# Altium PCB cs301_07b.PcbDoc (part 1 of 2)
Units mil, origin at the board's own origin, x right, y up, seen from the top; angles counter-clockwise.
Board outline 3480 x 5007.33 mil, 2 copper layers (Top Layer, Bottom Layer); 134 components, 90 nets, 408 pads, 151 vias.
Unrouted connection lines stored in the file: 2.
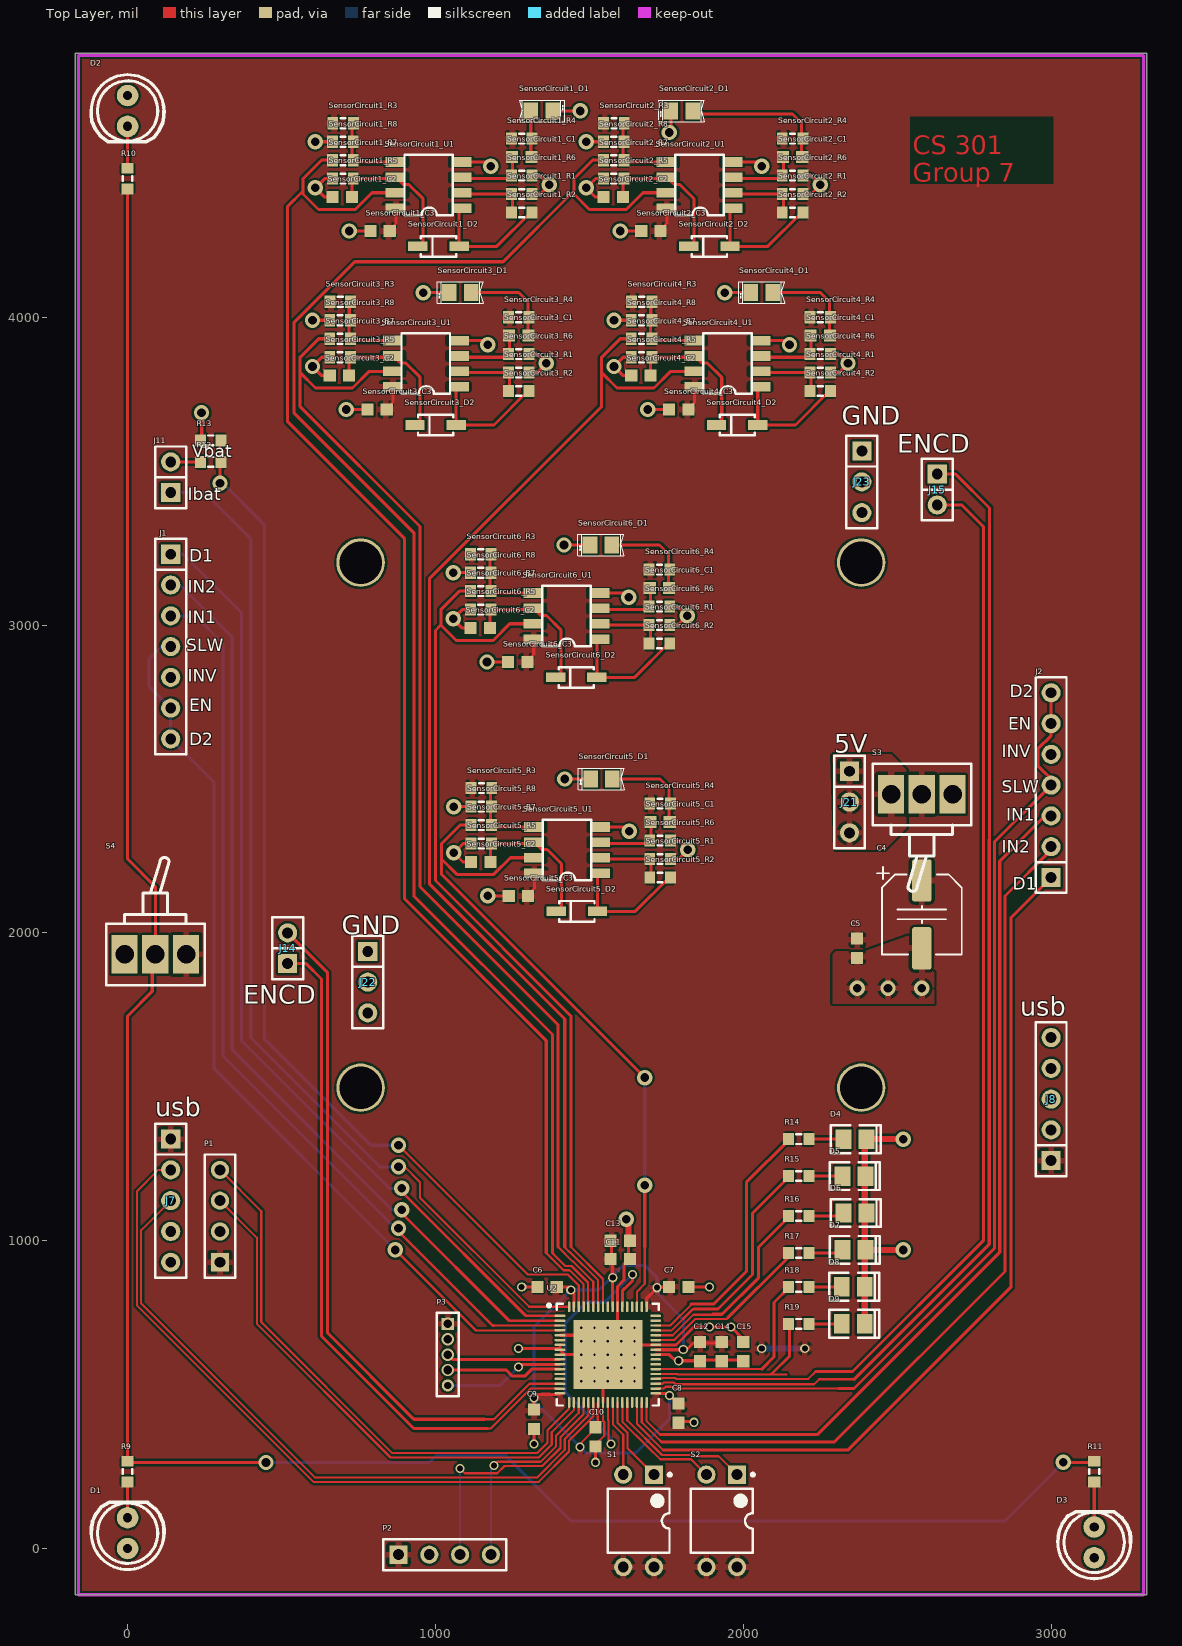
[diagram p0: Top Layer view]
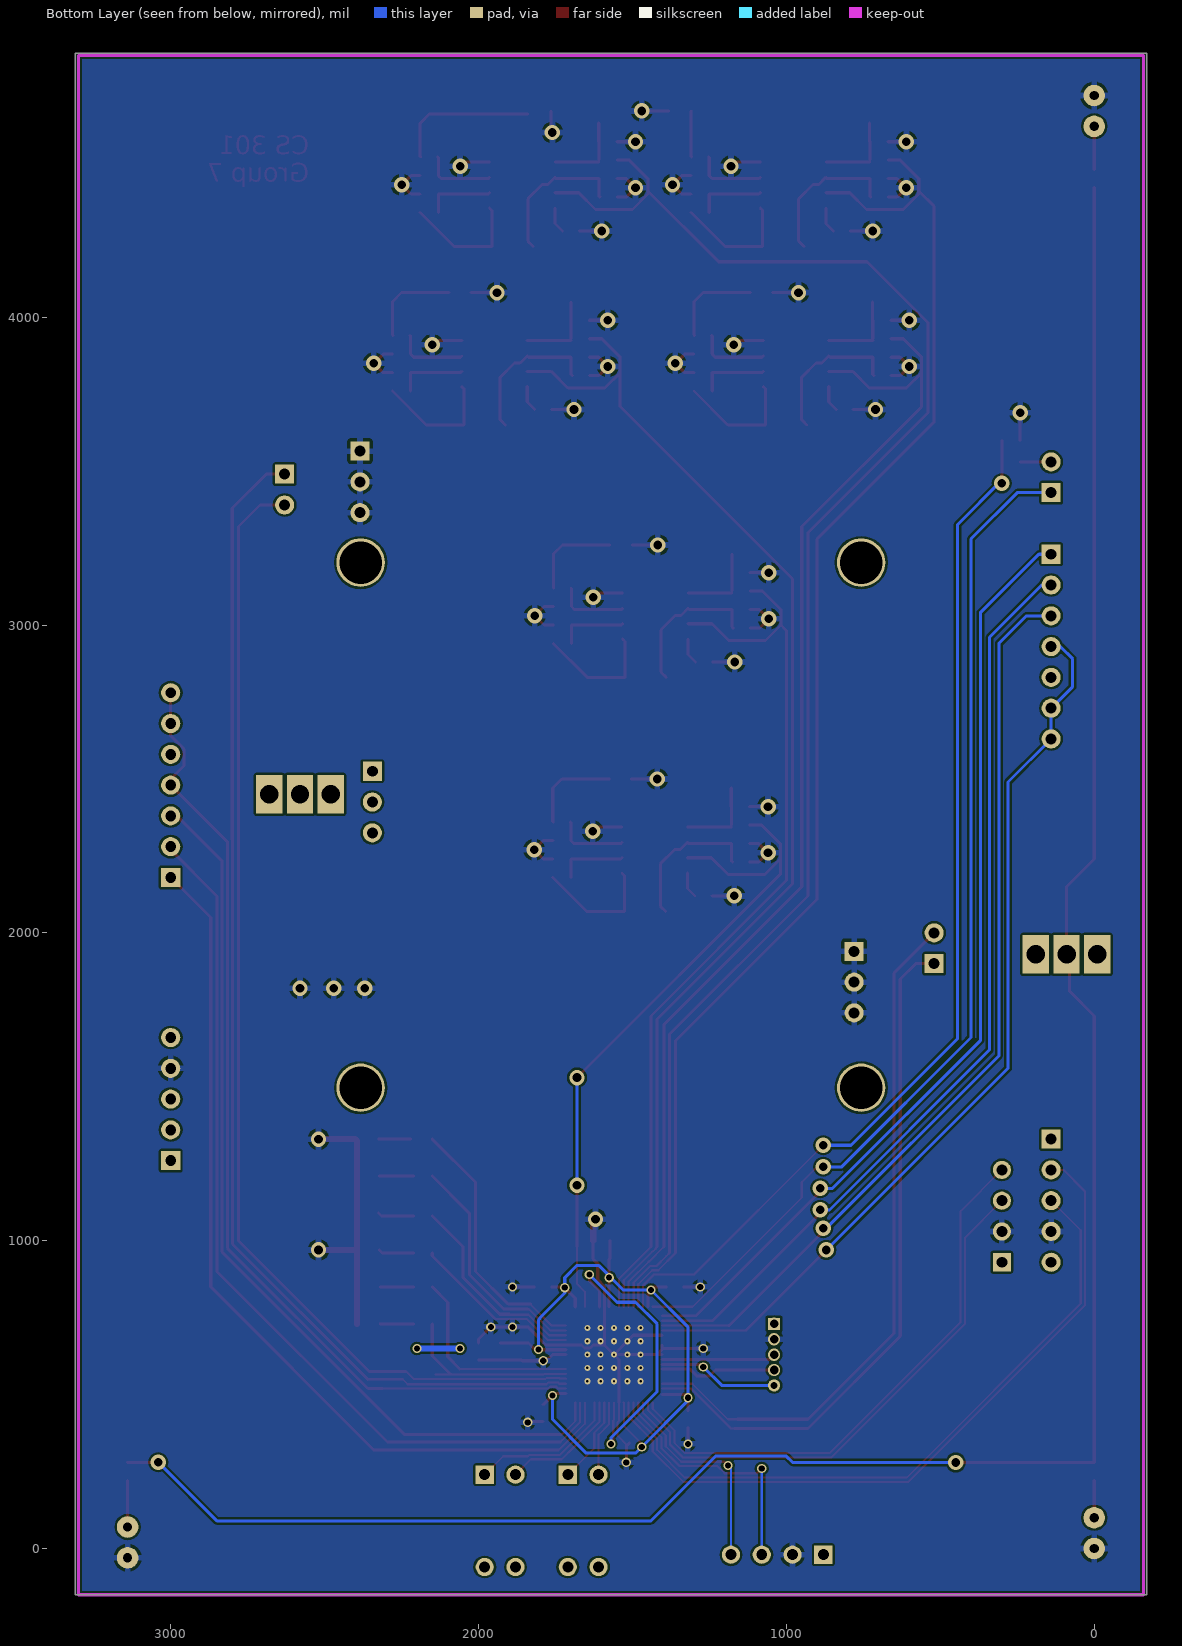
[diagram p1: Bottom Layer view, seen from below]

## Layer stack, top to bottom
Top Solder: solder mask 0.4, Solder Resist, Dk 3.5
Top Layer: signal copper 1.4
Dielectric1: dielectric 12.6, FR-4, Dk 4.8
Bottom Layer: signal copper 1.4
Bottom Solder: solder mask 0.4, Solder Resist, Dk 3.5

## Board outline
-170,4857.33 -170,4750 -170,-150 3310,-150 3310,4857.33

## Design rules (kind name [scope] priority, off if disabled: settings)
Clearance [All] p1: gap=7 ignorepadtopadclearanceinfootprint=FALSE
PolygonConnect [All] p1: connectstyle=Relief reliefconductorwidth=20 reliefentries=4 polygonreliefangle="90 Angle" airgapwidth=10
RoomDefinition SensorCircuit6 [InComponentClass('SensorCircuit6')] p1: confinementstyle=ConfineIn formatcopy=TRUE lockcomponents=FALSE outline 977.56,2790 1857.56,2790 1857.56,3350 977.56,3350
RoomDefinition SensorCircuit5 [InComponentClass('SensorCircuit5')] p2: confinementstyle=ConfineIn formatcopy=TRUE lockcomponents=FALSE outline 979.53,2030 1859.53,2030 1859.53,2590 979.53,2590
RoomDefinition SensorCircuit3 [InComponentClass('SensorCircuit3')] p3: confinementstyle=ConfineIn formatcopy=TRUE lockcomponents=FALSE outline 520.47,3610 1400.47,3610 1400.47,4170 520.47,4170
RoomDefinition SensorCircuit2 [InComponentClass('SensorCircuit2')] p4: confinementstyle=ConfineIn formatcopy=TRUE lockcomponents=FALSE outline 1410,4190 2290,4190 2290,4750 1410,4750
RoomDefinition SensorCircuit1 [InComponentClass('SensorCircuit1')] p5: confinementstyle=ConfineIn formatcopy=TRUE lockcomponents=FALSE outline 530,4190 1410,4190 1410,4750 530,4750
RoomDefinition SensorCircuit4 [InComponentClass('SensorCircuit4')] p6: confinementstyle=ConfineIn formatcopy=TRUE lockcomponents=FALSE outline 1500,3610 2380,3610 2380,4170 1500,4170
RoutingVias [All] p1: holewidth=20 width=30 viastyle="Through Hole" minholewidth=20 minwidth=20 maxholewidth=28 maxwidth=50
SilkToSolderMaskClearance SilkscreenOverComponentPads [IsPad] p1: minsilkscreentomaskgap=10 clearancetoexposedcopper=TRUE
SolderMaskExpansion [All] p1: expansion=4
Width [All] p1: maxlimit=30 minlimit=7 preferedwidth=10 minimp=50.000000 maximp=50.000000 favimp=50.000000
29 further rules are at their usual default settings.

## Classes and differential pairs
channel class Sheet1: SensorCircuit1 SensorCircuit2 SensorCircuit3 SensorCircuit4 SensorCircuit5 SensorCircuit6
net class SO[1..6]: SO1 SO2 SO3 SO4 SO5 SO6
component class SensorCircuit6: SensorCircuit6_C1 SensorCircuit6_C2 SensorCircuit6_C3 SensorCircuit6_D1 SensorCircuit6_D2 SensorCircuit6_R1 SensorCircuit6_R2 SensorCircuit6_R3 SensorCircuit6_R4 SensorCircuit6_R5 SensorCircuit6_R6 SensorCircuit6_R7 SensorCircuit6_R8 SensorCircuit6_U1
component class SensorCircuit5: SensorCircuit5_C1 SensorCircuit5_C2 SensorCircuit5_C3 SensorCircuit5_D1 SensorCircuit5_D2 SensorCircuit5_R1 SensorCircuit5_R2 SensorCircuit5_R3 SensorCircuit5_R4 SensorCircuit5_R5 SensorCircuit5_R6 SensorCircuit5_R7 SensorCircuit5_R8 SensorCircuit5_U1
component class SensorCircuit4: SensorCircuit4_C1 SensorCircuit4_C2 SensorCircuit4_C3 SensorCircuit4_D1 SensorCircuit4_D2 SensorCircuit4_R1 SensorCircuit4_R2 SensorCircuit4_R3 SensorCircuit4_R4 SensorCircuit4_R5 SensorCircuit4_R6 SensorCircuit4_R7 SensorCircuit4_R8 SensorCircuit4_U1
component class SensorCircuit3: SensorCircuit3_C1 SensorCircuit3_C2 SensorCircuit3_C3 SensorCircuit3_D1 SensorCircuit3_D2 SensorCircuit3_R1 SensorCircuit3_R2 SensorCircuit3_R3 SensorCircuit3_R4 SensorCircuit3_R5 SensorCircuit3_R6 SensorCircuit3_R7 SensorCircuit3_R8 SensorCircuit3_U1
component class SensorCircuit2: SensorCircuit2_C1 SensorCircuit2_C2 SensorCircuit2_C3 SensorCircuit2_D1 SensorCircuit2_D2 SensorCircuit2_R1 SensorCircuit2_R2 SensorCircuit2_R3 SensorCircuit2_R4 SensorCircuit2_R5 SensorCircuit2_R6 SensorCircuit2_R7 SensorCircuit2_R8 SensorCircuit2_U1
component class SensorCircuit1: SensorCircuit1_C1 SensorCircuit1_C2 SensorCircuit1_C3 SensorCircuit1_D1 SensorCircuit1_D2 SensorCircuit1_R1 SensorCircuit1_R2 SensorCircuit1_R3 SensorCircuit1_R4 SensorCircuit1_R5 SensorCircuit1_R6 SensorCircuit1_R7 SensorCircuit1_R8 SensorCircuit1_U1

## Components (designator, comment, footprint, x,y, rotation, side; value= is the part's Value field where it differs from the comment)
C4 "22u" ECE-CAPAE6.3X5.4SM 2580,2060 r270 top
C5 "100n" ECE-CAPC1608-0603SM 2370,1950 r90 top
C6 "100n" ECE-CAPC1608-0603SM 1362.44,850 r0 top
C7 "100n" ECE-CAPC1608-0603SM 1790,850 r180 top
C8 "100n" ECE-CAPC1608-0603SM 1790,440 r90 top
C9 "100n" ECE-CAPC1608-0603SM 1320,420 r90 top
C10 "100n" ECE-CAPC1608-0603SM 1520,362.44 r90 top
C11 "100n" ECE-CAPC1608-0603SM 1600,940 r180 top
C12 "100n" ECE-CAPC1608-0603SM 1860,640 r90 top
C13 "1u" ECE-CAPC1608-0603SM 1600,1000 r180 top
C14 "1u" ECE-CAPC1608-0603SM 1930,640 r90 top
C15 "1u" ECE-CAPC1608-0603SM 2000,640 r270 top
D1 "LED" LED0.1/5MM 0,100 r0 top
D2 "LED" LED0.1/5MM 0,4620 r180 top
D3 "LED" LED0.1/5MM 3140,70 r0 top
D4 "LED" ECE-LED2012-0805SM 2362.6,1330 r0 top
D5 "LED" ECE-LED2012-0805SM 2360,1210 r0 top
D6 "LED" ECE-LED2012-0805SM 2362.6,1090 r0 top
D7 "LED" ECE-LED2012-0805SM 2360,970 r0 top
D8 "LED" ECE-LED2012-0805SM 2357.4,850 r0 top
D9 "LED" ECE-LED2012-0805SM 2357.4,730 r0 top
J1 "CON7" SIP7 140,3230 r270 top locked
J2 "CON7" SIP7 3000,2180 r90 top locked
J7 "usb" SIP5 140,1330 r270 top locked
J8 "usb" SIP5 3000,1260 r90 top locked
J11 "Battery" sip2 140,3430 r90 top locked
J14 "ENCD" sip2 520,1900 r90 top locked
J15 "ENCD" sip2 2630,3490 r270 top locked
J21 "5V" sip3 2345,2525 r270 top locked
J22 "GND" sip3 780,1940 r270 top locked
J23 "GND" sip3 2385,3565 r270 top locked
P1 "SerialHeader" HDR1X4 300,930 r90 top
P2 "SerialHeader" HDR1X4 880,-20 r0 top
P3 "MHDR1X5" MHDR1X5 1040,730 r270 top
R9 "150" ECE-RESC1608-0603SM 0,250 r270 top
R10 "150" ECE-RESC1608-0603SM 0,4450.47 r90 top
R11 "150" ECE-RESC1608-0603SM 3140,250 r270 top
R12 "100K" ECE-RESC1608-0603SM 270,3530 r0 top
R13 "100K" ECE-RESC1608-0603SM 270.47,3600 r180 top
R14 "150" ECE-RESC1608-0603SM 2180,1330 r0 top
R15 "150" ECE-RESC1608-0603SM 2180,1210 r0 top
R16 "150" ECE-RESC1608-0603SM 2180,1080 r0 top
R17 "150" ECE-RESC1608-0603SM 2180,960 r0 top
R18 "150" ECE-RESC1608-0603SM 2180,850 r0 top
R19 "150" ECE-RESC1608-0603SM 2180,730 r0 top
S1 "SW DIP-2" DIP-4 1660,90 r270 top
S2 "SW DIP-2" DIP-4 1930,90 r270 top
S3 "SW-SPDT" SW-SPDT 2680,2450 r180 top
S4 "SW-SPDT" SW-SPDT -10,1930 r0 top
SensorCircuit1_C1 "15n" ECE-CAPC1608-0603SM 1280,4520 r0 top (schematic designator C1)
SensorCircuit1_C2 "680n" ECE-CAPC1608-0603SM 697.56,4390 r0 top (schematic designator C2)
SensorCircuit1_C3 "100n" ECE-CAPC1608-0603SM 820,4280 r180 top (schematic designator C3)
SensorCircuit1_D1 "TEMT6200" ECE-SENSOR-0805SM 1345.43,4670 r180 top (schematic designator D1)
SensorCircuit1_D2 "1N4148" ECE-DIO-SOD123SM 1010,4230 r180 top (schematic designator D2)
SensorCircuit1_R1 "5.6k" ECE-RESC1608-0603SM 1280,4400 r0 top (schematic designator R1)
SensorCircuit1_R2 "100k" ECE-RESC1608-0603SM 1280,4340 r0 top (schematic designator R2)
SensorCircuit1_R3 "47k" ECE-RESC1608-0603SM 700,4630 r180 top (schematic designator R3)
SensorCircuit1_R4 "100k" ECE-RESC1608-0603SM 1280,4580 r180 top (schematic designator R4)
SensorCircuit1_R5 "100k" ECE-RESC1608-0603SM 699.53,4450 r0 top (schematic designator R5)
SensorCircuit1_R6 "100k" ECE-RESC1608-0603SM 1280,4460 r180 top (schematic designator R6)
SensorCircuit1_R7 "100k" ECE-RESC1608-0603SM 699.53,4510 r0 top (schematic designator R7)
SensorCircuit1_R8 "47k" ECE-RESC1608-0603SM 699.53,4570 r0 top (schematic designator R8)
SensorCircuit1_U1 "LT6221" ECE-SO8 978.11,4429.13 r180 top (schematic designator U1)
SensorCircuit2_C1 "15n" ECE-CAPC1608-0603SM 2160,4520 r0 top (schematic designator C1)
SensorCircuit2_C2 "680n" ECE-CAPC1608-0603SM 1577.56,4390 r0 top (schematic designator C2)
SensorCircuit2_C3 "100n" ECE-CAPC1608-0603SM 1700,4280 r180 top (schematic designator C3)
SensorCircuit2_D1 "TEMT6200" ECE-SENSOR-0805SM 1800,4670 r0 top (schematic designator D1)
SensorCircuit2_D2 "1N4148" ECE-DIO-SOD123SM 1890,4230 r180 top (schematic designator D2)
SensorCircuit2_R1 "5.6k" ECE-RESC1608-0603SM 2160,4400 r0 top (schematic designator R1)
SensorCircuit2_R2 "100k" ECE-RESC1608-0603SM 2160,4340 r0 top (schematic designator R2)
SensorCircuit2_R3 "47k" ECE-RESC1608-0603SM 1580,4630 r180 top (schematic designator R3)
SensorCircuit2_R4 "100k" ECE-RESC1608-0603SM 2160,4580 r180 top (schematic designator R4)
SensorCircuit2_R5 "100k" ECE-RESC1608-0603SM 1579.53,4450 r0 top (schematic designator R5)
SensorCircuit2_R6 "100k" ECE-RESC1608-0603SM 2160,4460 r180 top (schematic designator R6)
SensorCircuit2_R7 "100k" ECE-RESC1608-0603SM 1579.53,4510 r0 top (schematic designator R7)
SensorCircuit2_R8 "47k" ECE-RESC1608-0603SM 1579.53,4570 r0 top (schematic designator R8)
SensorCircuit2_U1 "LT6221" ECE-SO8 1858.11,4429.13 r180 top (schematic designator U1)
SensorCircuit3_C1 "15n" ECE-CAPC1608-0603SM 1270.47,3940 r0 top (schematic designator C1)
SensorCircuit3_C2 "680n" ECE-CAPC1608-0603SM 688.03,3810 r0 top (schematic designator C2)
SensorCircuit3_C3 "100n" ECE-CAPC1608-0603SM 810.47,3700 r180 top (schematic designator C3)
SensorCircuit3_D1 "TEMT6200" ECE-SENSOR-0805SM 1080.47,4080 r0 top (schematic designator D1)
SensorCircuit3_D2 "1N4148" ECE-DIO-SOD123SM 1000.47,3650 r180 top (schematic designator D2)
SensorCircuit3_R1 "5.6k" ECE-RESC1608-0603SM 1270.47,3820 r0 top (schematic designator R1)
SensorCircuit3_R2 "100k" ECE-RESC1608-0603SM 1270.47,3760 r0 top (schematic designator R2)
SensorCircuit3_R3 "47k" ECE-RESC1608-0603SM 690.47,4050 r180 top (schematic designator R3)
SensorCircuit3_R4 "100k" ECE-RESC1608-0603SM 1270.47,4000 r180 top (schematic designator R4)
SensorCircuit3_R5 "100k" ECE-RESC1608-0603SM 690,3870 r0 top (schematic designator R5)
SensorCircuit3_R6 "100k" ECE-RESC1608-0603SM 1270.47,3880 r180 top (schematic designator R6)
SensorCircuit3_R7 "100k" ECE-RESC1608-0603SM 690,3930 r0 top (schematic designator R7)
SensorCircuit3_R8 "47k" ECE-RESC1608-0603SM 690,3990 r0 top (schematic designator R8)
SensorCircuit3_U1 "LT6221" ECE-SO8 968.58,3849.13 r180 top (schematic designator U1)
SensorCircuit4_C1 "15n" ECE-CAPC1608-0603SM 2250,3940 r0 top (schematic designator C1)
SensorCircuit4_C2 "680n" ECE-CAPC1608-0603SM 1667.56,3810 r0 top (schematic designator C2)
SensorCircuit4_C3 "100n" ECE-CAPC1608-0603SM 1790,3700 r180 top (schematic designator C3)
SensorCircuit4_D1 "TEMT6200" ECE-SENSOR-0805SM 2060,4080 r0 top (schematic designator D1)
SensorCircuit4_D2 "1N4148" ECE-DIO-SOD123SM 1980,3650 r180 top (schematic designator D2)
SensorCircuit4_R1 "5.6k" ECE-RESC1608-0603SM 2250,3820 r0 top (schematic designator R1)
SensorCircuit4_R2 "100k" ECE-RESC1608-0603SM 2250,3760 r0 top (schematic designator R2)
SensorCircuit4_R3 "47k" ECE-RESC1608-0603SM 1670,4050 r180 top (schematic designator R3)
SensorCircuit4_R4 "100k" ECE-RESC1608-0603SM 2250,4000 r180 top (schematic designator R4)
SensorCircuit4_R5 "100k" ECE-RESC1608-0603SM 1669.53,3870 r0 top (schematic designator R5)
SensorCircuit4_R6 "100k" ECE-RESC1608-0603SM 2250,3880 r180 top (schematic designator R6)
SensorCircuit4_R7 "100k" ECE-RESC1608-0603SM 1669.53,3930 r0 top (schematic designator R7)
SensorCircuit4_R8 "47k" ECE-RESC1608-0603SM 1669.53,3990 r0 top (schematic designator R8)
SensorCircuit4_U1 "LT6221" ECE-SO8 1948.11,3849.13 r180 top (schematic designator U1)
SensorCircuit5_C1 "15n" ECE-CAPC1608-0603SM 1729.53,2360 r0 top (schematic designator C1)
SensorCircuit5_C2 "680n" ECE-CAPC1608-0603SM 1147.09,2230 r0 top (schematic designator C2)
SensorCircuit5_C3 "100n" ECE-CAPC1608-0603SM 1269.53,2120 r180 top (schematic designator C3)
SensorCircuit5_D1 "TEMT6200" ECE-SENSOR-0805SM 1539.53,2500 r0 top (schematic designator D1)
SensorCircuit5_D2 "1N4148" ECE-DIO-SOD123SM 1459.53,2070 r180 top (schematic designator D2)
SensorCircuit5_R1 "5.6k" ECE-RESC1608-0603SM 1729.53,2240 r0 top (schematic designator R1)
SensorCircuit5_R2 "100k" ECE-RESC1608-0603SM 1729.53,2180 r0 top (schematic designator R2)
SensorCircuit5_R3 "47k" ECE-RESC1608-0603SM 1149.53,2470 r180 top (schematic designator R3)
SensorCircuit5_R4 "100k" ECE-RESC1608-0603SM 1729.53,2420 r180 top (schematic designator R4)
SensorCircuit5_R5 "100k" ECE-RESC1608-0603SM 1149.06,2290 r0 top (schematic designator R5)
SensorCircuit5_R6 "100k" ECE-RESC1608-0603SM 1729.53,2300 r180 top (schematic designator R6)
SensorCircuit5_R7 "100k" ECE-RESC1608-0603SM 1149.06,2350 r0 top (schematic designator R7)
SensorCircuit5_R8 "47k" ECE-RESC1608-0603SM 1149.06,2410 r0 top (schematic designator R8)
SensorCircuit5_U1 "LT6221" ECE-SO8 1427.64,2269.13 r180 top (schematic designator U1)
SensorCircuit6_C1 "15n" ECE-CAPC1608-0603SM 1727.56,3120 r0 top (schematic designator C1)
SensorCircuit6_C2 "680n" ECE-CAPC1608-0603SM 1145.12,2990 r0 top (schematic designator C2)
SensorCircuit6_C3 "100n" ECE-CAPC1608-0603SM 1267.56,2880 r180 top (schematic designator C3)
SensorCircuit6_D1 "TEMT6200" ECE-SENSOR-0805SM 1537.56,3260 r0 top (schematic designator D1)
SensorCircuit6_D2 "1N4148" ECE-DIO-SOD123SM 1457.56,2830 r180 top (schematic designator D2)
SensorCircuit6_R1 "5.6k" ECE-RESC1608-0603SM 1727.56,3000 r0 top (schematic designator R1)
SensorCircuit6_R2 "100k" ECE-RESC1608-0603SM 1727.56,2940 r0 top (schematic designator R2)
SensorCircuit6_R3 "47k" ECE-RESC1608-0603SM 1147.56,3230 r180 top (schematic designator R3)
SensorCircuit6_R4 "100k" ECE-RESC1608-0603SM 1727.56,3180 r180 top (schematic designator R4)
SensorCircuit6_R5 "100k" ECE-RESC1608-0603SM 1147.09,3050 r0 top (schematic designator R5)
SensorCircuit6_R6 "100k" ECE-RESC1608-0603SM 1727.56,3060 r180 top (schematic designator R6)
SensorCircuit6_R7 "100k" ECE-RESC1608-0603SM 1147.09,3110 r0 top (schematic designator R7)
SensorCircuit6_R8 "47k" ECE-RESC1608-0603SM 1147.09,3170 r0 top (schematic designator R8)
SensorCircuit6_U1 "LT6221" ECE-SO8 1425.67,3029.13 r180 top (schematic designator U1)
U2 "CY8C5888LTI-LP097" CYP-LTX68_N 1560,630 r0 top

## Footprints (in the part's own frame and the unit in brackets; to place one, negate y for a bottom-side part, rotate by r counter-clockwise, add the part's x,y. Pads: shape width x height; smd on the part's side, far side on the other; paste and mask are expansions set on the pad)
CYP-LTX68_N [mm] "QFN, 68-Leads, Body 8x8mm, Pitch 0.4mm, Thermal Pad 5.7x5.7mm, IPC Medium Density"
  oval 0.9x0.2 smd: 1(-3.95,3.2) 2(-3.95,2.8) 3(-3.95,2.4) 4(-3.95,2) 5(-3.95,1.6) 6(-3.95,1.2) 7(-3.95,0.8) 8(-3.95,0.4) 9(-3.95,0) 10(-3.95,-0.4) 11(-3.95,-0.8) 12(-3.95,-1.2) 13(-3.95,-1.6) 14(-3.95,-2) 15(-3.95,-2.4) 16(-3.95,-2.8) 17(-3.95,-3.2) 35(3.95,-3.2) 36(3.95,-2.8) 37(3.95,-2.4) 38(3.95,-2) 39(3.95,-1.6) 40(3.95,-1.2) 41(3.95,-0.8) 42(3.95,-0.4) 43(3.95,0) 44(3.95,0.4) 45(3.95,0.8) 46(3.95,1.2) 47(3.95,1.6) 48(3.95,2) 49(3.95,2.4) 50(3.95,2.8) 51(3.95,3.2)
  oval 0.2x0.9 smd: 18(-3.2,-3.95) 19(-2.8,-3.95) 20(-2.4,-3.95) 21(-2,-3.95) 22(-1.6,-3.95) 23(-1.2,-3.95) 24(-0.8,-3.95) 25(-0.4,-3.95) 26(0,-3.95) 27(0.4,-3.95) 28(0.8,-3.95) 29(1.2,-3.95) 30(1.6,-3.95) 31(2,-3.95) 32(2.4,-3.95) 33(2.8,-3.95) 34(3.2,-3.95) 52(3.2,3.95) 53(2.8,3.95) 54(2.4,3.95) 55(2,3.95) 56(1.6,3.95) 57(1.2,3.95) 58(0.8,3.95) 59(0.4,3.95) 60(0,3.95) 61(-0.4,3.95) 62(-0.8,3.95) 63(-1.2,3.95) 64(-1.6,3.95) 65(-2,3.95) 66(-2.4,3.95) 67(-2.8,3.95) 68(-3.2,3.95)
  rect 5.7x5.7 smd: 69(0,0)
  silkscreen extent -4.97,-4.2 4.2,4.2, body extent -4.05,-4.05 4.05,4.05, height 1
DIP-4 [mm] "DIP; 4 Leads; Row Spacing 7.62 mm; Pitch 2.54 mm"
  rect 1.5x1.5 hole 0.9: 1(-3.81,1.27)
  round 1.5 hole 0.9: 2(-3.81,-1.27) 3(3.81,-1.27) 4(3.81,1.27)
  silkscreen extent -3.93,-2.55 2.65,2.7, body extent -3.15,-2.5 3.15,2.5, height 5.6
ECE-CAPAE6.3X5.4SM [mm] "Capacitor, polarized, aluminum can; 6.3x5.4mm DxH"
  round 0.508 on Mech15: 0(0,0)
  rrect25% 3.5x1.6 smd: 1(-2.8,0) 2(2.8,0)
  silkscreen extent -3.9,-3.7 3.3,3.3, body extent -3.3,-3.3 3.3,3.3, height 4.23
ECE-CAPC1608-0603SM [mm] "Chip Capacitor, Body 1.6x0.8mm, IPC Medium Density"
  rect 1x1 smd: 1(-0.8,0) 2(0.8,0)
  body extent -0.87,-0.48 0.87,0.48, height 0.85
ECE-DIO-SOD123SM [mm] "SOD-123; 2 Leads; Body 2.7 x 1.6 mm, (LxW)"
  rect 1.6x0.8 smd: 1(-1.7,0) 2(1.7,0)
  silkscreen extent -1.45,-0.85 1.45,0.85
ECE-LED2012-0805SM [mm] "RED AS AlGaAs SMD LED, Body; 2mm x 1.25 mm (LxW)"
  rect 1.3x1.6 smd: 1(-0.95,0) 2(0.95,0)
  silkscreen extent -2,-1.15 2.13,1.15
ECE-RESC1608-0603SM [mm] "Chip Resistor, Body 1.6x0.8mm, IPC Medium Density"
  rect 0.9x1 smd: 1(-0.85,0) 2(0.85,0)
  silkscreen extent -0.2,-0.4 0.2,0.4, body extent -0.85,-0.48 0.85,0.48, height 0.6
ECE-SENSOR-0805SM [mm] "Chip Sensor, Body 2.0x1.3mm, IPC Medium Density"
  rect 1.2x1.4 smd: 1(-0.9,0) 2(0.9,0)
  silkscreen extent -1.91,-0.89 1.88,0.89
ECE-SO8 [mm] "8-Lead Plastic Small Outline, 1.27mm pitch"
  rect 1.5x0.8 smd: 1(-2.8,1.905) 2(-2.8,0.635) 3(-2.8,-0.635) 4(-2.8,-1.9) 5(2.8,-1.905) 6(2.8,-0.635) 7(2.8,0.635) 8(2.8,1.905)
  silkscreen extent -2,-2.5 2,2.5, body extent -3,-2.45 3,2.45, height 1.7
HDR1X4 [mm] "Connector; Header; 4 Position"
  rect 1.5x1.5 hole 0.9: 1(0,0)
  round 1.5 hole 0.9: 2(2.54,0) 3(5.08,0) 4(7.62,0)
  silkscreen extent -1.27,-1.27 8.89,1.27
LED0.1/5MM [mil]
  round 70 hole 30: A(0,0) K(0,-100)
  silkscreen extent -118,-168 118,50
MHDR1X5 [mm] "Connector; Header; 5 Position"
  rect 1x1 hole 0.6: 1(0,0)
  round 1 hole 0.6: 2(1.27,0) 3(2.54,0) 4(3.81,0) 5(5.08,0)
  silkscreen extent -0.9,-0.9 5.98,0.9
sip2 [mil]
  rect 62x62 hole 35.43: 1(0,0)
  round 62 hole 35.43: 2(100,0)
  silkscreen extent -50,-50 150,50
sip3 [mil]
  rect 62x62 hole 35.43: 1(0,0)
  round 62 hole 35.43: 2(100,0) 3(200,0)
  silkscreen extent -50,-50 250,50
SIP5 [mil]
  rect 62x62 hole 35.43: 1(0,0)
  round 62 hole 35.43: 2(100,0) 3(200,0) 4(300,0) 5(400,0)
  silkscreen extent -50,-50 450,50
SIP7 [mil]
  rect 62x62 hole 35.43: 1(0,0)
  round 62 hole 35.43: 2(100,0) 3(200,0) 4(300,0) 5(400,0) 6(500,0) 7(600,0)
  silkscreen extent -50,-50 650,50
SW-SPDT [mil]
  rect 85x125 hole 60: 1(0,0) 2(100,0) 3(200,0)
  silkscreen extent -60,-100 260,315

## Part data
C4: library part CAP000304, "CAP 22uF 35V ELE SM", Revision="July-2002: Re-released for DXP Platform.", UoA Stock#=CAP000304
C5 C6 C7 C8 C9 C10 C11 C12 SensorCircuit1_C3 SensorCircuit2_C3 SensorCircuit3_C3 SensorCircuit4_C3 SensorCircuit5_C3 SensorCircuit6_C3: library part CAP000624, "CAP CER 100nF 25V X7R SM0603", UoA Stock#=CAP000624
C13 C14 C15: library part CAP000630, "CAP CER 1uF 50V X7R SM0603", UoA Stock#=CAP000630
D4 D5 D6 D7 D8 D9: library part DIO000105, "LED RED ORANGE CLEAR 0805 SMD", UoA Stock#=DIO000105
J1 J2: "Connector"
J7 J8: library part CON5, "Connector"
J11 J14 J15: library part CON2, "Connector"
J21 J22 J23: library part CON3, "Connector"
P1 P2: library part "Header 4", "Header, 4-Pin", LatestRevisionDate=17-Jul-2002, LatestRevisionNote="Re-released for DXP Platform.", Publisher="Altium Limited"
P3: "Header, 5-Pin", LatestRevisionDate=17-Jul-2002, LatestRevisionNote="Re-released for DXP Platform.", Publisher="Altium Limited"
R9 R10 R11 R14 R15 R16 R17 R18 R19: library part RES000128, "RES CER 150R 1608 SM", UoA Stock#=RES000128
R12 R13 SensorCircuit1_R2 SensorCircuit1_R4 SensorCircuit1_R5 SensorCircuit1_R6 SensorCircuit1_R7 SensorCircuit2_R2 SensorCircuit2_R4 SensorCircuit2_R5 SensorCircuit2_R6 SensorCircuit2_R7 SensorCircuit3_R2 SensorCircuit3_R4 SensorCircuit3_R5 SensorCircuit3_R6 SensorCircuit3_R7 SensorCircuit4_R2 SensorCircuit4_R4 SensorCircuit4_R5 SensorCircuit4_R6 SensorCircuit4_R7 SensorCircuit5_R2 SensorCircuit5_R4 SensorCircuit5_R5 SensorCircuit5_R6 SensorCircuit5_R7 SensorCircuit6_R2 SensorCircuit6_R4 SensorCircuit6_R5 SensorCircuit6_R6 SensorCircuit6_R7: library part RES000162, "RES CER 100K 1608 SM", UoA Stock#=RES000162
S1 S2: "DIP Switch, 2 Position, SPST", LatestRevisionDate=17-Jul-2002, LatestRevisionNote="Re-released for DXP Platform.", PackageReference=DIP-4, Published=24-Mar-1999, Publisher="Altium Limited"
S3 S4: "Toggle Switch"
SensorCircuit1_C1 SensorCircuit2_C1 SensorCircuit3_C1 SensorCircuit4_C1 SensorCircuit5_C1 SensorCircuit6_C1: library part CAP000619, "CAP CER 15nF 50V X7R SM0603", UoA Stock#=CAP000619
SensorCircuit1_C2 SensorCircuit2_C2 SensorCircuit3_C2 SensorCircuit4_C2 SensorCircuit5_C2 SensorCircuit6_C2: library part CAP000629, "CAP CER 680nF 25V X7R SM0603", UoA Stock#=CAP000629
SensorCircuit1_D1 SensorCircuit2_D1 SensorCircuit3_D1 SensorCircuit4_D1 SensorCircuit5_D1 SensorCircuit6_D1: library part OTH000001, "LIGHT SENSOR TEMT6200 SM", Revision="July-2002: Re-released for DXP Platform.", UoA Stock#=OTH000001
SensorCircuit1_D2 SensorCircuit2_D2 SensorCircuit3_D2 SensorCircuit4_D2 SensorCircuit5_D2 SensorCircuit6_D2: library part DIO000103, "DIODE GEN PURPOSE 300mA SM", UoA Stock#=DIO000103
SensorCircuit1_R1 SensorCircuit2_R1 SensorCircuit3_R1 SensorCircuit4_R1 SensorCircuit5_R1 SensorCircuit6_R1: library part RES000147, "RES CER 5K6 1608 SM", UoA Stock#=RES000147
SensorCircuit1_R3 SensorCircuit1_R8 SensorCircuit2_R3 SensorCircuit2_R8 SensorCircuit3_R3 SensorCircuit3_R8 SensorCircuit4_R3 SensorCircuit4_R8 SensorCircuit5_R3 SensorCircuit5_R8 SensorCircuit6_R3 SensorCircuit6_R8: library part RES000158, "RES CER 47K 1608 SM", UoA Stock#=RES000158
SensorCircuit1_U1 SensorCircuit2_U1 SensorCircuit3_U1 SensorCircuit4_U1 SensorCircuit5_U1 SensorCircuit6_U1: library part OPA000102, "IC OPAMP LT6221 DUAL SM", UoA Stock#=OPA000102
U2: "PSoC Programmable System-on-Chip, 256 KB Flash, 38 GPIOs, 1.71 to 5.5 V, 68-Pin QFN (LTX68), Tray", Manufacturer=Cypress, Max. Operating Frequency (MHz)=80, Max. Operating Temp. (degreesC)=85, Max. Operating Voltage (V)=5.5, Min. Operating Temp. (degreesC)=-40, Min. Operating Voltage (V)=1.71, Code_JEDEC=MO-220, ComponentLink1Description="Manufacturer URL", ComponentLink1URL=http://www.cypress.com/, ComponentLink2Description=Datasheet, ComponentLink2URL=http://www.cypress.com/?docID=47570, ComponentLink3Description="Package Specification", ComponentLink3URL=http://www.cypress.com/?docID=38892, CPU Core="ARM Cortex-M3", DatasheetVersion="Rev. *E", Flash (KB)=256, Mounting Technology="Surface Mount", No. of GPIOs=38, PackageDescription="68-Pin Quad Flat No Lead, Body 8.00 x 8.00 mm, Pitch 0.40 mm", PackageReference=LTX68, PackageVersion="Rev. *E, 07/2012", Packing=Tray, PartNumber=CY8C5888LTI-LP097, SRAM (KB)=64

## Free pads (board coordinates)
  round 157.48 hole 137.8 unplated: 1(757,1497) 1(757,3203) 1(2383,1497) 1(2383,3203)

## Via types
v1: diameter 50, hole 28, Top Layer to Bottom Layer, 99 vias
v2: diameter 19.68, hole 7.87, Top Layer to Bottom Layer, 25 vias
v3: diameter 30, hole 20, Top Layer to Bottom Layer, 23 vias
v4: diameter 40, hole 28, Top Layer to Bottom Layer, 4 vias

## Nets (pads, with @x,y where several pads share a name; then routed paths per layer and width w, separated by ;. In a path a pad name is that pad's centre, name@x,y a point inside that pad or via, vN(x,y) a via of type N, cw(c..) or ccw(c..) an arc to the next point about the centre after c; other vN are vias at no path point)
5V0: J21.1 J21.2 J21.3 S3.3
  other v1: 2345,2325 2345,2425 2480,2450 2345,2525
D+: J7.3 U2.22 | length 2207
  Top Layer w7: v1(140,1130) 44,1034 44,796 609.5,230.5 1329.7,230.5 1420,320.8 1420,355.87 1497.01,432.88 U2.22@1497.01,474.49
D-: J7.2 U2.23 | length 2383.5
  Top Layer w7: v1(140,1230) 100,1230 30,1160 30,790 603.5,216.5 1335.49,216.5 1434,315.01 1434,350.07 1512.76,428.83 U2.23@1512.76,474.49
DIP0: S1.1 U2.28 | length 283.6
  Top Layer w7: U2.28@1591.5,474.49 1591.5,408.3 1624,375.8 1624,326 S1.1@1710,240
DIP1: S1.2 U2.27 | length 248.7
  Top Layer w7: U2.27@1575.75,474.49 1576.22,474.02 1576.22,403.78 1610,370 S1.2@1610,240
DIP2: S2.1 U2.30 | length 487.9
  Top Layer w7: U2.30@1622.99,474.49 1622.99,416.81 1735.8,304 1835.8,304 1839.8,300 1920,300 S2.1@1980,240
DIP3: S2.2 U2.29 | length 406.3
  Top Layer w7: U2.29@1607.24,474.49 1607.24,412.35 1689.6,330 1690,330 1730,290 1830,290 S2.2@1880,240